# Altium PCB PCB1.PcbDoc
Units mm, origin at the board's own origin, x right, y up, seen from the top; angles counter-clockwise.
Board outline 92.78 x 94.58 mm, 2 copper layers (Top Layer, Bottom Layer); 39 components, 38 nets, 141 pads, 0 vias.
Unrouted connection lines stored in the file: 1.
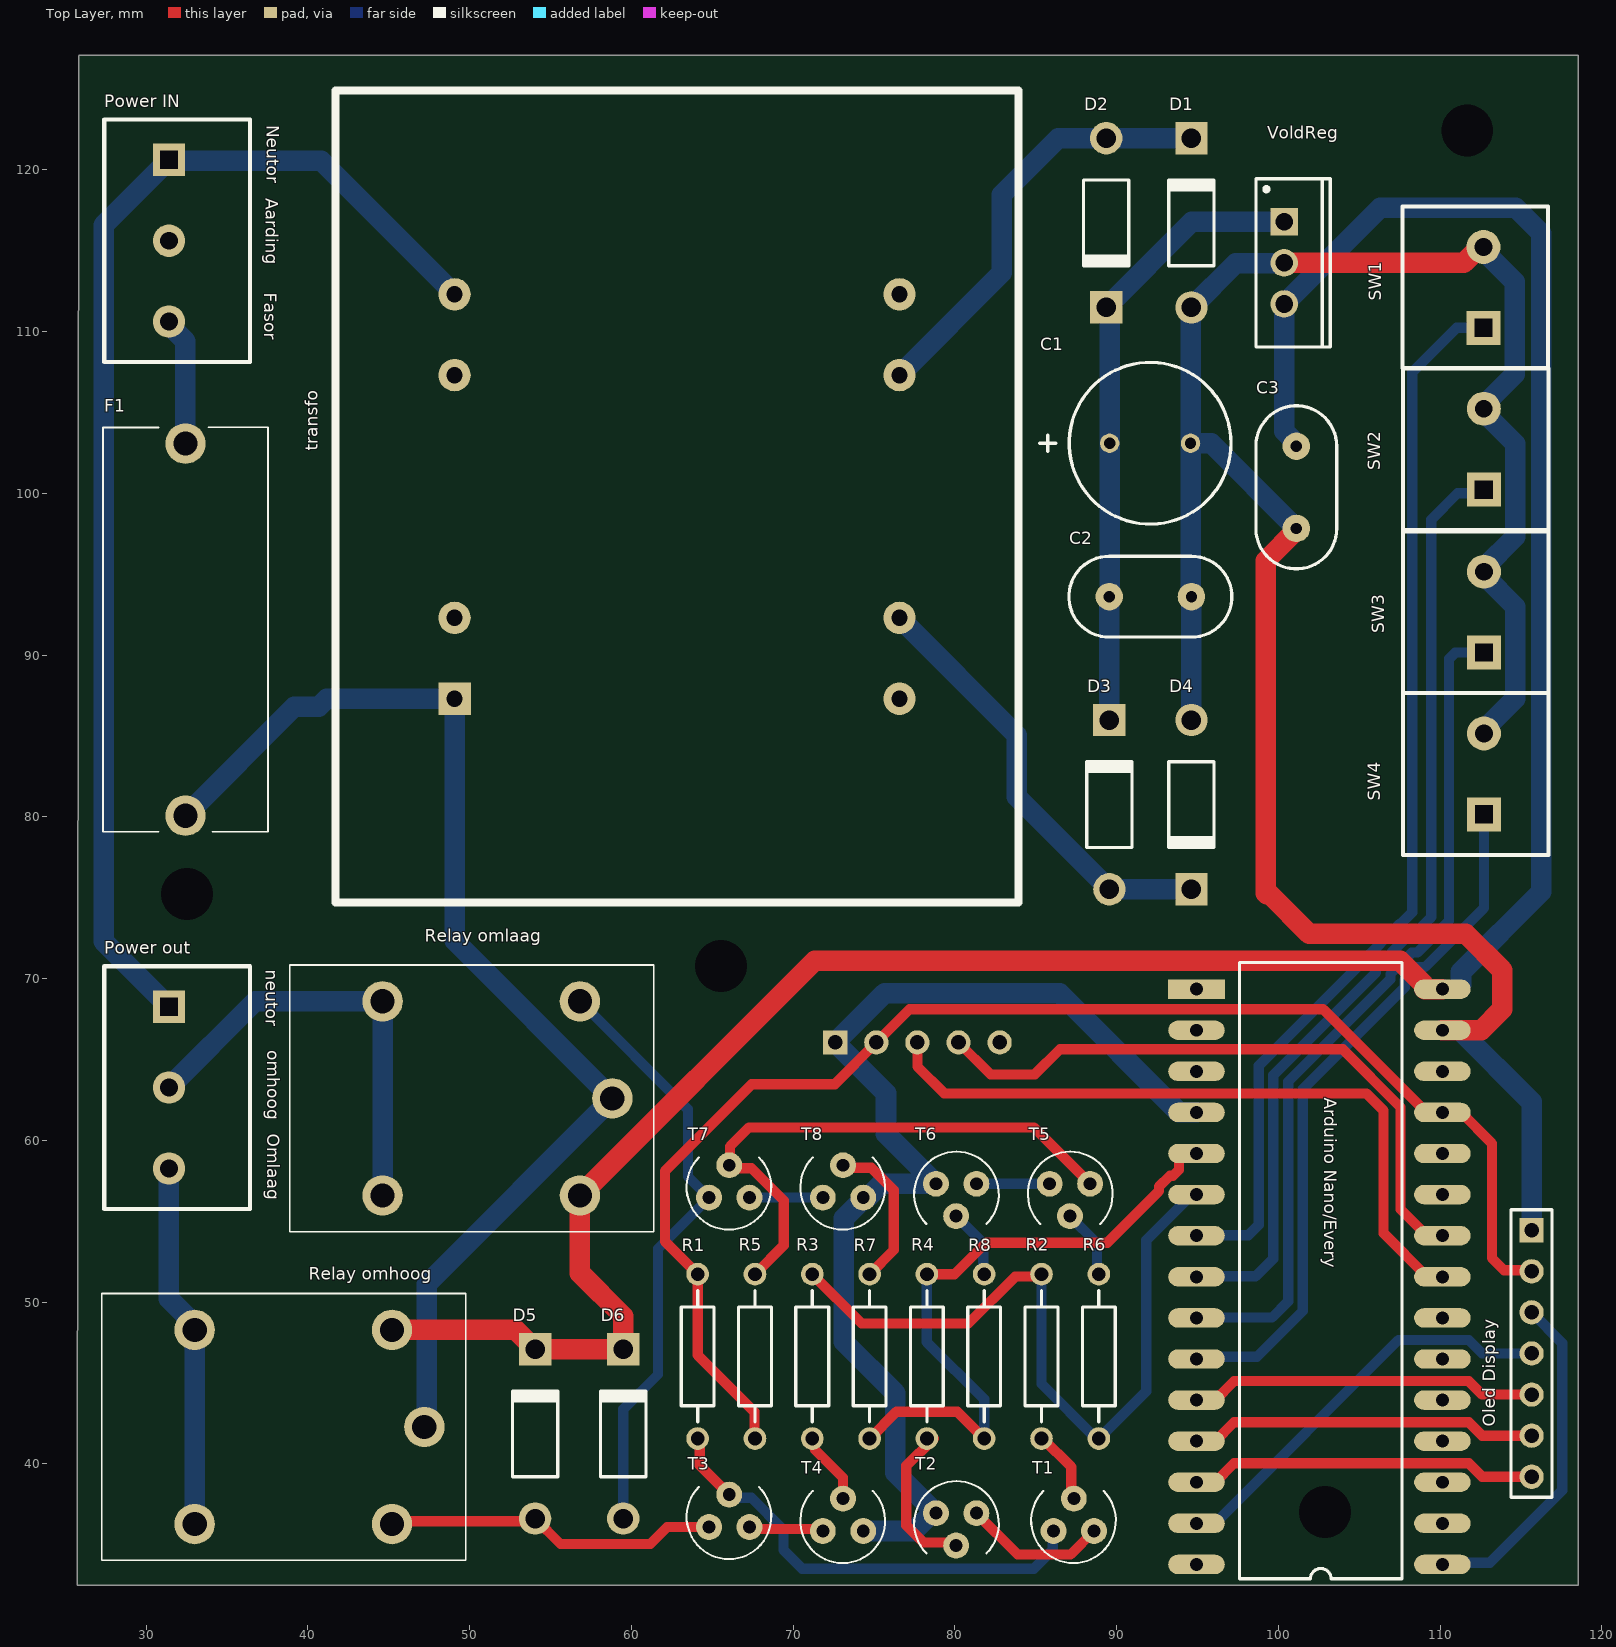
[diagram p0: Top Layer view]
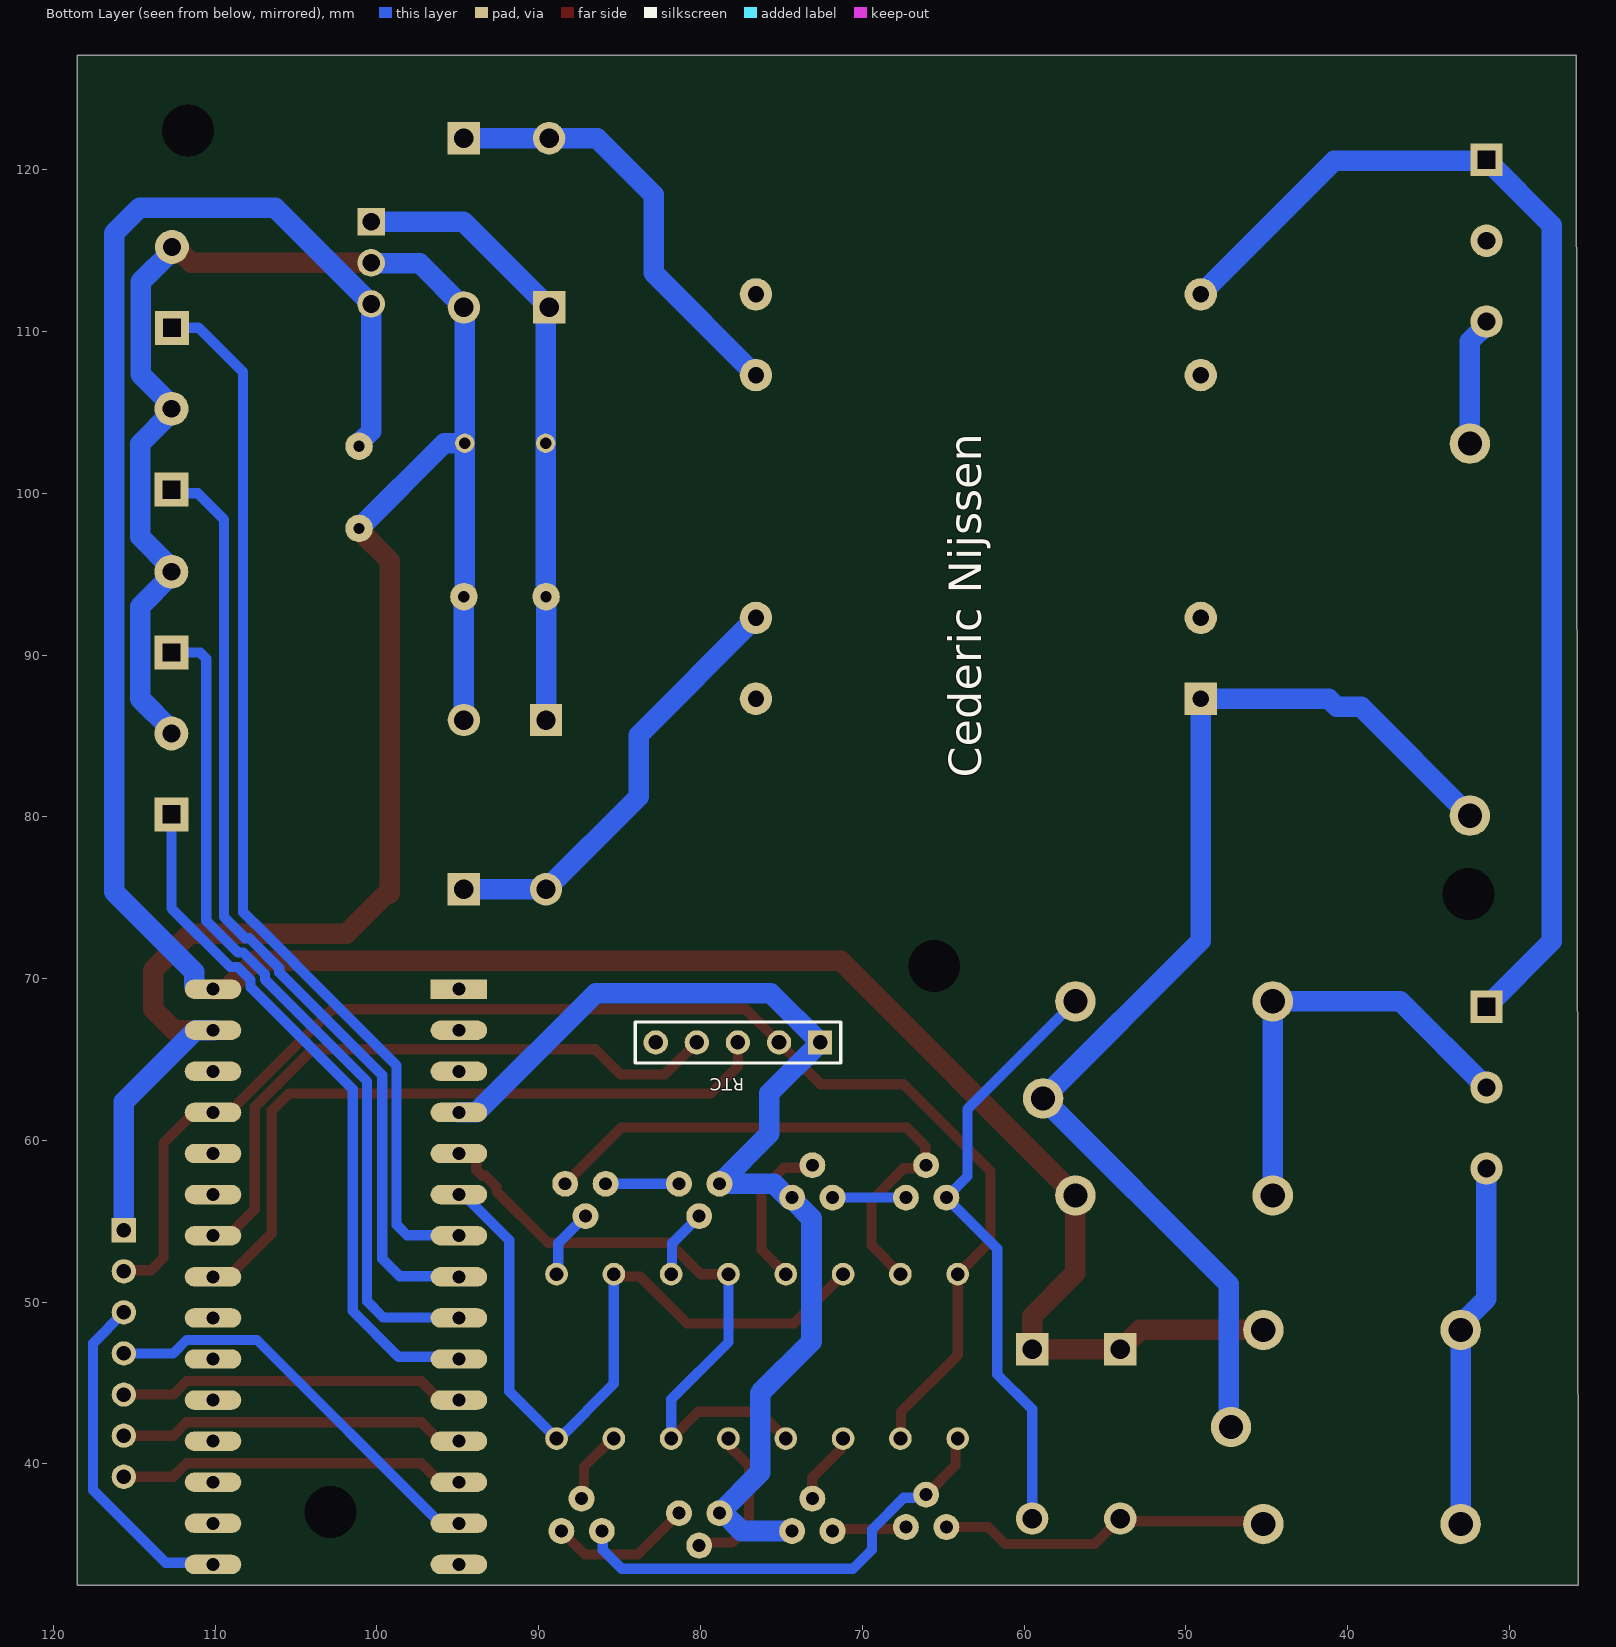
[diagram p1: Bottom Layer view, seen from below]

## Layer stack, top to bottom
Top Solder: solder mask 0.0102, Solder Resist, Dk 3.5
Top Layer: signal copper 0.0356
Dielectric 1: dielectric 0.32, FR-4, Dk 4.8
Bottom Layer: signal copper 0.0356
Bottom Solder: solder mask 0.0102, Solder Resist, Dk 3.5

## Board outline
25.85,127.05 25.875,127.075 118.525,127.075 118.525,32.5 25.75,32.5

## Design rules (kind name [scope] priority, off if disabled: settings)
Clearance [All] p1: gap=0.254 ignorepadtopadclearanceinfootprint=FALSE except(0: Arc-Hole Track-Hole SMDPad-Hole THPad-Hole Via-Hole Fill-Hole Poly-Hole Region-Hole Text-Hole)
HoleSize [All] p1: absolutevalues=TRUE maxlimit=5.08 minlimit=0.025 maxpercent=80.000 minpercent=20.000
PolygonConnect [All] p1: connectstyle=Relief reliefconductorwidth=0.254 reliefentries=4 polygonreliefangle="90 Angle" airgapwidth=0.254
RoutingVias [All] p1: holewidth=0.711 width=1.27 viastyle="Through Hole" minholewidth=0.711 minwidth=1.27 maxholewidth=0.711 maxwidth=1.27
SilkToSolderMaskClearance [IsPad] p1: minsilkscreentomaskgap=0.1 clearancetoexposedcopper=TRUE
SolderMaskExpansion [All] p1: expansion=0.102 istentingtop=FALSE
Width [All] p1: maxlimit=2.54 minlimit=0.254 preferedwidth=0.635 minimp=50.000000 maximp=50.000000 favimp=50.000000
28 further rules are at their usual default settings.

## Components (designator, comment, footprint, x,y, rotation, side; value= is the part's Value field where it differs from the comment)
"Arduino Nano/Every" "Arduino Every" "ARDUINO NANO/EVERY - DUPLICATE" 94.936,69.345 r0 top locked
C1 "Cap Pol2" "CAPACITROR 1000UF" 94.569,103.092 r180 top value=1000uF
C2 "Cap" "CAPACITOR 100PF" 94.625,93.607 r180 top value=100pF
C3 "Cap" "CAPACITOR 100PF" 101.108,97.827 r90 top value=100pF
D1 "Diode 1N4007" DO-41 94.625,116.718 r90 top
D2 "Diode 1N4007" DO-41 89.355,116.718 r270 top
D3 "Diode 1N4007" DO-41 89.55,80.75 r90 top
D4 "Diode 1N4007" DO-41 94.625,80.75 r270 top
D5 "Diode 1N4001" DO-41 54.05,41.85 r90 top
D6 "Diode 1N4001" DO-41 59.499,41.85 r90 top
F1 "Fuse_case" FLUSE_HOLDER 32.438,103.07 r270 top
"Oled Display" "Header 7" HDR1X7 115.65,54.445 r270 top
"Power IN" "Header 3" HEADER_3 31.415,120.612 r270 top
"Power out" "Header 3" HEADER_3 31.415,68.263 r270 top
R1 "Res2" AXIAL-0.4 64.1,46.646 r90 top value=1K
R2 "Res2" AXIAL-0.4 85.355,46.646 r90 top value=10k
R3 "Res2" AXIAL-0.4 71.185,46.646 r90 top value=10k
R4 "Res2" AXIAL-0.4 78.27,46.646 r90 top value=10k
R5 "Res2" AXIAL-0.4 67.642,46.646 r270 top value=1K
R6 "Res2" AXIAL-0.4 88.898,46.646 r270 top value=10k
R7 "Res2" AXIAL-0.4 74.727,46.646 r270 top value=10k
R8 "Res2" AXIAL-0.4 81.813,46.646 r270 top value=10k
"Relay omhoog" "Relay-SPST" "PRINT RELAY" 45.206,48.281 r180 top
"Relay omlaag" "Relay-SPST" "PRINT RELAY" 56.824,68.59 r180 top
RTC "Header 4" HDR1X5 72.605,66.05 r0 bottom
SW1 "PTS645SM43SMTR92LFS" HEADER_2 112.675,110.225 r90 top
SW2 "PTS645SM43SMTR92LFS" HEADER_2 112.7,100.225 r90 top
SW3 "PTS645SM43SMTR92LFS" HEADER_2 112.706,90.151 r90 top
SW4 "PTS645SM43SMTR92LFS" HEADER_2 112.706,80.151 r90 top
T1 "2N3904" NPN 88.602,35.85 r180 top
T2 "2N3904" NPN 78.829,36.95 r0 top
T3 "2N3904" NPN 67.303,36.095 r180 top
T4 "2N3904" NPN 74.336,35.85 r180 top
T5 "2N3904" NPN 85.862,57.315 r0 top
T6 "2N3904" NPN 78.829,57.315 r0 top
T7 "2N3904" NPN 67.303,56.461 r180 top
T8 "2N3904" NPN 74.336,56.461 r180 top
transfo "Header 4" TRANSFO 76.575,87.3 r90 top
VoldReg "L7809CV" 7809 100.358,114.245 r270 top

## Footprints (in the part's own frame and the unit in brackets; to place one, negate y for a bottom-side part, rotate by r counter-clockwise, add the part's x,y. Pads: shape width x height; smd on the part's side, far side on the other; paste and mask are expansions set on the pad)
7809 [mm] "TO, Thru-Hole, Vertical, Heatsink Mounted; 3 In-Line Leads; Pitch 2.54 mm"
  rect 1.7x1.7 hole 1.1: 1(-2.54,0)
  round 1.7 hole 1.1: 2(0,0) 3(2.54,0)
  silkscreen extent -5.2,-1.75 5.2,2.85, body extent -5.25,-1.8 5.25,2.9, height 19.7
"ARDUINO NANO/EVERY - DUPLICATE" [mm]
  rect 3.5x1.2 hole 0.8: 1(0,0)
  oval 3.5x1.2 hole 0.8: 2(0,-2.54) 3(0,-5.08) 5(0,-10.16) 6(0,-12.7) 7(0,-15.24) 8(0,-17.78) 9(0,-20.32) 10(0,-22.86) 11(0,-25.4) 12(0,-27.94) 13(0,-30.48) 14(0,-33.02) 15(0,-35.56) 16(15.2,-35.56) 17(15.2,-33.02) 18(15.2,-30.48) 19(15.2,-27.94) 20(15.2,-25.4) 21(15.2,-22.86) 22(15.2,-20.32) 23(15.2,-17.78) 24(15.2,-15.24) 25(15.2,-12.7) 26(15.2,-10.16) 27(15.2,-7.62) 28(15.2,-5.08) 29(0,-7.62) 29(15.2,-2.54) 30(15.2,0)
  silkscreen extent 2.67,-36.45 12.7,1.65
AXIAL-0.4 [mm] "Axial Device, Thru-Hole; 2 Leads; 0.4 in Pin Spacing"
  round 1.4 hole 0.85: 1(-5.08,0) 2(5.08,0)
  silkscreen extent -4.06,-1.02 4.06,1.02
"CAPACITOR 100PF" [mm]
  round 1.7 hole 0.7: 1(0,0) 2(5.08,0)
  silkscreen extent -2.5,-2.5 7.58,2.5
"CAPACITROR 1000UF" [mm]
  round 1.2 hole 0.7: 1(0,0) 2(5,0)
  silkscreen extent -2.5,-5 9.34,5
DO-41 [mm] "Diode, Axial; Body 5.2 x 2.7 mm (LxDia. max), Lead Dia. 0.86 mm (max)"
  round 2 hole 1.2: 1(-5.23,0)
  rect 2x2 hole 1.2: 2(5.23,0)
  silkscreen extent -2.65,-1.4 2.75,1.4
FLUSE_HOLDER [mm]
  round 2.5 hole 1.5: 1(0,0) 2(23,0)
  silkscreen extent -1,-5.1 24,5.1
HDR1X5 [mm] "Connector; Header; 5 Position"
  rect 1.5x1.5 hole 0.9: 1(0,0)
  round 1.5 hole 0.9: 2(2.54,0) 3(5.08,0) 4(7.62,0) 5(10.16,0)
  silkscreen extent -1.27,-1.27 11.43,1.27
HDR1X7 [mm] "Connector; Header; 7 Position"
  rect 1.5x1.5 hole 0.9: 1(0,0)
  round 1.5 hole 0.9: 2(2.54,0) 3(5.08,0) 4(7.62,0) 5(10.16,0) 6(12.7,0) 7(15.24,0)
  silkscreen extent -1.27,-1.27 16.51,1.27
HEADER_2 [mm]
  rect 2.1x2.1 hole 1.1 square: 1(0,0)
  round 2.1 hole 1.1: 2(5,0)
  silkscreen extent -2.5,-4 7.5,5
HEADER_3 [mm]
  rect 2x2 hole 1.1 square: 1(0,0)
  round 2 hole 1.1: 2(5,0) 3(10,0)
  silkscreen extent -2.5,-4 12.5,5
NPN [mm]
  round 1.6 hole 0.8: 1(0,0) 2(1.25,-2) 3(2.5,0)
  silkscreen extent -1.35,-2.49 3.89,1.98
"PRINT RELAY" [mm]
  round 2.5 hole 1.5: 1(-2,6) 2(12.2,12) 2(12.2,0) 3(0,12) 4(0,0)
  silkscreen extent -4.55,-2.25 17.95,14.25
TRANSFO [mm]
  rect 2x2 hole 1: 1(0,27.5)
  round 2 hole 1: 2(25,27.5) 3(5,0) 4(20,0)
  round 2 hole 1 unplated: ""(0,0) ""(5,27.5) ""(20,27.5) ""(25,0)
  silkscreen extent -12.6,-7.35 37.6,34.85

## Part data
C1: "Polarized Capacitor (Axial)", LatestRevisionDate=17-Jul-2002, LatestRevisionNote="Re-released for DXP Platform.", PackageDescription="Polarized Capacitor; 2 Leads", PackageReference=POLAR0.8, Published=8-Jun-2000, Publisher="Altium Limited"
C2 C3: "Capacitor", LatestRevisionDate=17-Jul-2002, LatestRevisionNote="Re-released for DXP Platform.", PackageDescription="Radial Cap, Thru-Hole; 2 Leads; 0.3 in Pin Spacing", PackageReference=RAD-0.3, Published=8-Jun-2000, Publisher="Altium Limited"
D1 D2 D3 D4 D5 D6: "1 Amp General Purpose Rectifier", Code_JEDEC=DO-204-AL, ComponentLink1Description="Manufacturer Link", ComponentLink1URL=http://www.fairchildsemi.com/, ComponentLink2Description=Datasheet, ComponentLink2URL=http://www.fairchildsemi.com/ds/1N%2F1N4001.pdf, DatasheetVersion=1998, LatestRevisionDate=17-Jul-2002, LatestRevisionNote="Re-released for DXP Platform.", PackageDescription="Diode, Axial; Body 5.2 x 2.7 mm (LxDia. max), Lead Dia. 0.86 mm (max)", PackageReference=DO-41, PackageVersion=Aug-1999, Published=8-Jun-2000, Publisher="Altium Limited"
"Oled Display": "Header, 7-Pin", LatestRevisionDate=17-Jul-2002, LatestRevisionNote="Re-released for DXP Platform.", Publisher="Altium Limited"
"Power IN" "Power out": "Header, 3-Pin", LatestRevisionDate=17-Jul-2002, LatestRevisionNote="Re-released for DXP Platform.", Publisher="Altium Limited"
R1 R2 R3 R4 R5 R6 R7 R8: "Resistor", LatestRevisionDate=17-Jul-2002, LatestRevisionNote="Re-released for DXP Platform.", PackageDescription="Axial Device, Thru-Hole; 2 Leads; 0.4 in Pin Spacing", PackageReference=AXIAL-0.4, Published=8-Jun-2000, Publisher="Altium Limited"
"Relay omhoog" "Relay omlaag": "Single-Pole Single-Throw Relay", LatestRevisionDate=17-Jul-2002, LatestRevisionNote="Re-released for DXP Platform.", PackageReference=MODULE4, Published=24-Mar-1999, Publisher="Altium Limited"
RTC transfo: "Header, 4-Pin", LatestRevisionDate=17-Jul-2002, LatestRevisionNote="Re-released for DXP Platform.", Publisher="Altium Limited"
SW1 SW2 SW3 SW4: library part knop, "6 mm Tact Switche, SPST, NO, -20 to 60 degC, 4-Pin SMT, RoHS, Tape and Reel", Manufacturer="ITT Cannon", Datasheet URL=https://datasheet.ciiva.com/29903/getdatasheetpartid-786341-29903846.pdf, Datasheet Version=Feb-14, Manufacturer URL=http://www.ittcannon.com/
T1 T2 T3 T4 T5 T6 T7 T8: "NPN General Purpose Amplifier", ComponentLink1Description="Manufacturer Link", ComponentLink1URL=http://www.fairchildsemi.com/, ComponentLink2Description=Datasheet, ComponentLink2URL=http://www.fairchildsemi.com/ds/2N%2F2N3904.pdf, DatasheetVersion=1997, LatestRevisionDate=15-Jan-2003, LatestRevisionNote="PCB Footprint 'BCY-W3/D4.7' replaced", PackageDescription="TO, Flat Index; 3 In-Line, Axial Leads; Body Dia. 4.5mm; Leads 0.51 x 0.48 mm (max)", PackageReference=TO-92A, PackageVersion=Sep-1998, Published=8-Jun-2000, Publisher="Altium Limited"
VoldReg: library part "V-reg 7809", "Positive Voltage Regulator, 9V, 3-Pin TO-220", ComponentLink1Description="Manufacturer URL", ComponentLink1URL=http://www.st.com, ComponentLink2Description=Datasheet, ComponentLink2URL=http://www.st.com/internet/com/TECHNICAL_RESOURCES/TECHNICAL_LITERATURE/DATASHEET/CD00000444.pdf, ComponentLink3Description="Package Specification", ComponentLink3URL=http://www.st.com/internet/com/TECHNICAL_RESOURCES/TECHNICAL_LITERATURE/PACKAGE_INFORMATION/CD00004649.pdf, DatasheetVersion=16/11/2011, PackageDescription="TO, Thru-Hole, Vertical, Heatsink Mounted; 3 In-Line Leads; Pitch 2.54 mm", PackageReference=TO220, PackageVersion=ver3.0

## Free pads (board coordinates)
  round 1.524 hole 3.2 unplated: 2(32.525,75.225) 2(65.55,70.775) 2(102.875,37.025) 2(111.675,122.425)

## Nets (pads, with @x,y where several pads share a name; then routed paths per layer and width w, separated by ;. In a path a pad name is that pad's centre, name@x,y a point inside that pad or via, vN(x,y) a via of type N, cw(c..) or ccw(c..) an arc to the next point about the centre after c; other vN are vias at no path point)
230V: "Relay omhoog.1" "Relay omlaag.1" F1.2 transfo.1 | length 73.5
  Bottom Layer w1.27: F1.2 39.169,86.8 40.675,86.8 41.175,87.3 transfo.1 49.075,72.34 58.824,62.59 47.345,51.112 47.345,42.42 47.206,42.281
+5: "Arduino Nano/Every.27" "Oled Display.2" R1.2 R5.2 RTC.2 | length 88.5
  Top Layer w0.635: R5.2 67.607,41.601 67.607,43.218 64.1,46.725 R1.2 62.075,53.75 62.075,58.1 67.45,63.475 72.57,63.475 RTC.2 77.195,68.1 102.764,68.1 109.139,61.725 110.136,61.725 111.286,61.725 113.2,59.811 113.2,52.725 113.947,51.978 115.577,51.978 115.65,51.905
  Bottom Layer w0.635: 110.136,61.75 111.186,61.75
CLK: "Arduino Nano/Every.16" "Oled Display.3" | length 21.1
  Bottom Layer w0.635: 110.136,33.785 110.244,33.893 113.068,33.893 117.55,38.375 117.55,47.465 115.65,49.365
CS: "Arduino Nano/Every.13" "Oled Display.7" | length 21.6
  Top Layer w0.635: 94.936,38.865 96.086,38.865 97.257,40.037 111.771,40.037 112.602,39.205 115.65,39.205 ; 95.125,38.89 95.177,38.943
DC: "Arduino Nano/Every.12" "Oled Display.6" | length 21.6
  Top Layer w0.635: 94.936,41.405 96.086,41.405 97.257,42.577 111.771,42.577 112.602,41.745 115.65,41.745 ; 95.125,41.43 95.177,41.483
GND: "Arduino Nano/Every.29" "Oled Display.1" C1.1 C2.1 C3.1 D1.1 D4.1 RTC.1 SW1.2 SW2.2 SW3.2 SW4.2 T2.1 T4.1 T6.1 T8.1 VoldReg.2 | length 220.6
  Top Layer w1.27: T8.1@74.247,56.461 T8.1 ; VoldReg.2 111.47,114.245 SW1.2@112.45,115.225 ; C3.1 101.108,97.731 99.208,95.831 99.208,75.288 99.293,75.203 99.466,75.203 101.894,72.775 111.575,72.775 113.825,70.525 113.825,68.1 112.53,66.805 110.136,66.805
  Bottom Layer w0.635: T8.1 T8.1@74.597,56.461 ; T2.1@78.568,36.95 T2.1
  Bottom Layer w1.27: T4.1 77.468,35.85 T2.1@78.568,36.95 ; T8.1 74.336,56.371 73.138,55.174 73.138,47.557 76.316,44.379 76.316,39.463 T2.1 ; T8.1@74.597,56.461 75.452,57.315 T6.1 75.743,60.402 75.743,62.912 RTC.1 75.655,69.1 86.481,69.1 93.856,61.725 94.936,61.725 ; D4.1 C2.1 94.569,93.663 C1.1 ; VoldReg.2 100.338,114.225 97.362,114.225 D1.1 94.569,111.433 C1.1 ; C3.1 95.843,103.092 C1.1 ; 110.131,66.8 110.136,66.805 111.216,66.805 115.65,62.371 115.65,54.445 ; SW1.2 112.675,115 114.614,113.061 114.614,107.364 112.7,105.45 SW2.2 112.7,105 114.639,103.061 114.639,97.308 112.706,95.375 SW3.2 112.706,94.926 114.645,92.987 114.645,87.314 112.706,85.375 SW4.2
GND_230: "Power IN.1" "Power out.1" transfo.2 | length 76.8
  Bottom Layer w1.27: 31.415,68.263 27.375,72.304 27.375,116.571 31.415,120.612 31.477,120.55 40.825,120.55 transfo.2
MOSI: "Arduino Nano/Every.14" "Oled Display.4" | length 25.8
  Bottom Layer w0.635: 94.936,36.325 96.086,36.325 107.417,47.657 111.771,47.657 112.602,46.825 115.65,46.825
"NetArduino Nano/Every_5": "Arduino Nano/Every.5" R4.2 R7.2 R8.2 | length 40.4
  Top Layer w0.635: R7.2 76.387,43.225 80.153,43.225 R8.2 ; R4.2 79.976,51.726 81.925,53.675 89.426,53.675 92.614,56.863 92.614,57.13 93.3,57.817 93.485,57.817 93.857,58.188 93.857,58.924 94.118,59.185 94.936,59.185
  Bottom Layer w0.635: R4.2 78.27,47.53 81.813,43.987 R8.2
"NetArduino Nano/Every_6": "Arduino Nano/Every.6" R2.2 R3.2 R6.2 | length 47.4
  Top Layer w0.635: R3.2 74.235,48.675 80.828,48.675 83.732,51.579 85.209,51.579 R2.2 ; 93.964,56.675 95.175,56.675
  Bottom Layer w0.635: R2.2 85.355,44.945 88.734,41.566 R6.2 91.825,44.493 91.825,53.825 94.645,56.645 94.936,56.645
NetC1_2: C1.2 C2.2 D2.2 D3.2 VoldReg.1 | length 38.8
  Bottom Layer w1.27: D3.2 89.547,85.983 89.547,93.605 C2.2 89.569,93.632 C1.2 89.569,111.274 D2.2 94.652,116.785 VoldReg.1
NetD1_2: D1.2 D2.1 transfo.4 | length 26.9
  Bottom Layer w1.27: transfo.4 82.9,113.625 82.9,118.45 86.398,121.948 D2.1 D1.2
NetD3_1: D3.1 D4.2 transfo.3 | length 27.2
  Bottom Layer w1.27: transfo.3 83.825,85.05 83.825,81.245 D3.1 D4.2
NetD5_1: "Relay omhoog.3" D5.1 T3.3 | length 20.8
  Top Layer w0.635: 45.206,36.281 45.376,36.45 53.88,36.45 D5.1 55.622,35.048 61.172,35.048 62.218,36.095 T3.3
NetD6_1: "Relay omlaag.4" D6.1 T7.3 | length 37.5
  Bottom Layer w0.635: 56.824,68.59 63.5,61.915 63.5,57.764 T7.3 61.65,53.307 61.65,45.525 59.499,43.374 D6.1
NetF1_1: "Power IN.3" F1.1 | length 8
  Bottom Layer w1.27: 31.415,110.612 31.415,110.414 32.438,109.391 F1.1
"NetPower out_3": "Power out.3" "Relay omhoog.2" | length 22.6
  Bottom Layer w1.27: 31.415,58.263 31.415,50.204 33.006,48.613 33.006,48.281 33.006,36.281
NetR1_1: R1.1 T1.3 T3.2 | length 28.6
  Top Layer w0.635: R1.1 64.235,41.43 64.235,39.913 T3.2
  Bottom Layer w0.635: T3.2 66.238,37.91 67.427,37.91 69.4,35.938 69.4,34.697 70.572,33.525 84.875,33.525 86.047,34.697 86.047,35.795 T1.3
NetR2_1: R2.1 T1.2 | length 4.8
  Top Layer w0.635: R2.1@85.444,41.566 87.2,39.81 87.2,38.002 T1.2 T1.2@87.167,37.665
NetR3_1: R3.1 T4.2 | length 3.7
  Top Layer w0.635: 71.356,40.869 73.086,39.139 T4.2
NetR4_1: R4.1 T2.2 | length 9.7
  Top Layer w0.635: R4.1@78.687,41.566 77,39.878 77,36.2 78.065,35.135 79.894,35.135 T2.2
NetR5_1: R5.1 T5.3 T7.2 | length 34.9
  Top Layer w0.635: R5.1 69.425,53.508 69.425,56.278 67.427,58.276 66.238,58.276 T7.2 66.099,58.506 66.099,59.624 67.275,60.8 84.877,60.8 T5.3
NetR6_1: R6.1 T5.2 | length 4.6
  Top Layer w0.635: T5.2@86.927,55.5 T5.2
  Bottom Layer w0.635: T5.2 88.788,53.639 88.788,51.835 R6.1
NetR7_1: R7.1 T8.2 | length 9.6
  Top Layer w0.635: T8.2 73.235,58.311 74.839,58.311 76.225,56.925 76.225,53.223 R7.1
NetR8_1: R8.1 T6.2 | length 4.6
  Top Layer w0.635: T6.2 T6.2@80.264,55.5
  Bottom Layer w0.635: T6.2 81.755,53.639 81.755,51.783 R8.1
NetT1_1: T1.1 T2.3 | length 8.9
  Top Layer w0.635: T2.3 83.879,34.4 87.152,34.4 T1.1
NetT3_1: T3.1 T4.3 | length 4.6
  Top Layer w0.635: T3.1 67.426,35.973 71.714,35.973 T4.3
NetT5_1: T5.1 T6.3 | length 4.5
  Bottom Layer w0.635: T6.3 T5.1
NetT7_1: T7.1 T8.3 | length 4.5
  Bottom Layer w0.635: T7.1 T8.3
RD: "Power out.2" "Relay omlaag.2" | length 27.4
  Bottom Layer w1.27: 31.415,63.263 36.742,68.59 44.624,68.59 44.624,56.59
RES: "Arduino Nano/Every.11" "Oled Display.5" | length 21.6
  Top Layer w0.635: 94.936,43.945 96.086,43.945 97.257,45.117 111.771,45.117 112.602,44.285 115.65,44.285 ; 95.125,43.97 95.177,44.023
SCL: "Arduino Nano/Every.24" RTC.4 | length 39.8
  Top Layer w0.635: RTC.4 82.2,64.075 84.95,64.075 86.5,65.625 103.975,65.625 107.55,62.05 107.55,55.741 109.186,54.105 110.136,54.105
SDA: "Arduino Nano/Every.23" RTC.3 | length 43.8
  Top Layer w0.635: RTC.3 77.685,64.565 79.35,62.9 105.425,62.9 106.5,61.825 106.5,54.251 109.186,51.565 110.136,51.565
SW1: "Arduino Nano/Every.7" SW1.1 | length 66.2
  Top Layer w0.635: SW1.1@112.65,110.2 SW1.1
  Bottom Layer w0.635: 95.125,54.13 98.141,54.13 98.786,54.775 98.786,64.611 105.147,70.972 105.147,71.018 107.513,73.384 107.558,73.384 108.275,74.1 108.275,107.475 111.025,110.225 SW1.1@112.7,110.225
SW2: "Arduino Nano/Every.8" SW2.1 | length 59.2
  Top Layer w0.635: SW2.1@112.525,100.05 SW2.1
  Bottom Layer w0.635: 95.125,51.59 98.59,51.59 99.675,52.675 99.675,64.025 106.036,70.386 106.036,70.65 107.881,72.495 108.145,72.495 109.45,73.8 109.45,98.375 111.069,99.994 112.469,99.994 SW2.1
SW3: "Arduino Nano/Every.9" SW3.1 | length 52.3
  Bottom Layer w0.635: 95.125,49.05 99.611,49.05 100.611,50.05 100.611,63.636 106.925,69.95 106.925,70.281 108.249,71.606 108.581,71.606 110.55,73.575 110.55,89.779 110.922,90.151 SW3.1
SW4: "Arduino Nano/Every.10" SW4.1 | length 43.3
  Top Layer w0.635: SW4.1@112.657,80.101 SW4.1
  Bottom Layer w0.635: 95.125,46.51 95.24,46.625 98.675,46.625 101.5,49.45 101.5,63.15 107.814,69.464 107.814,69.913 108.618,70.717 109.067,70.717 112.706,74.356 SW4.1
VCC: "Arduino Nano/Every.30" "Relay omhoog.4" "Relay omlaag.3" C3.2 D5.2 D6.2 VoldReg.3 | length 163.4
  Top Layer w1.016: 56.824,56.59 56.825,56.59
  Top Layer w1.27: 45.206,48.281 52.849,48.281 D5.2 D6.2 59.499,49.126 56.825,51.8 56.825,56.59 ; 56.824,56.59 71.334,71.1 107.52,71.1 109.021,69.599 109.021,69.38 109.056,69.345 110.136,69.345
  Bottom Layer w1.016: C3.2 C3.2@101.108,103.092 ; 110.225,69.345 111.017,69.345 111.287,69.615
  Bottom Layer w1.27: C3.2@101.108,103.092 100.358,103.842 VoldReg.3 106.303,117.65 114.675,117.65 116.25,116.075 116.25,75.37 111.287,70.407 111.287,69.615
pads on no net: "Arduino Nano/Every.1" "Arduino Nano/Every.2" "Arduino Nano/Every.3" "Arduino Nano/Every.15" "Arduino Nano/Every.17" "Arduino Nano/Every.18" "Arduino Nano/Every.19" "Arduino Nano/Every.20" "Arduino Nano/Every.21" "Arduino Nano/Every.22" "Arduino Nano/Every.25" "Arduino Nano/Every.26" "Arduino Nano/Every.28" "Power IN.2" RTC.5 transfo.

## Silkscreen, mask and mechanical layers (free items; w line width, h text height)
Top Overlay:
  text "Neutor" at 37.452,122.756 h0.76 r270
  text "Aarding" at 37.406,118.251 h0.76 r270
  text "Fasor" at 37.302,112.389 h0.76 r270
  text "neutor" at 37.402,70.531 h0.76 r270
  text "omhoog" at 37.481,65.558 h0.76 r270
  text "Omlaag" at 37.506,60.395 h0.76 r270
Bottom Overlay:
  text "Cederic Nijssen" at 62.641,82.421 h2 r270
board outline:
  lines w0.1: 118.55,56.269 118.55,32.5 25.775,32.5 25.775,127.075 118.55,127.075 118.55,103.556 118.55,56.269 ; 118.55,56.269 118.55,56.269